# Altium PCB 转接板V02.PcbDoc
Units mil, origin at the board's own origin, x right, y up, seen from the top; angles counter-clockwise.
Board outline 1410.03 x 2710.03 mil, 2 copper layers (Top Layer, Bottom Layer); 10 components, 14 nets, 93 pads, 111 vias.
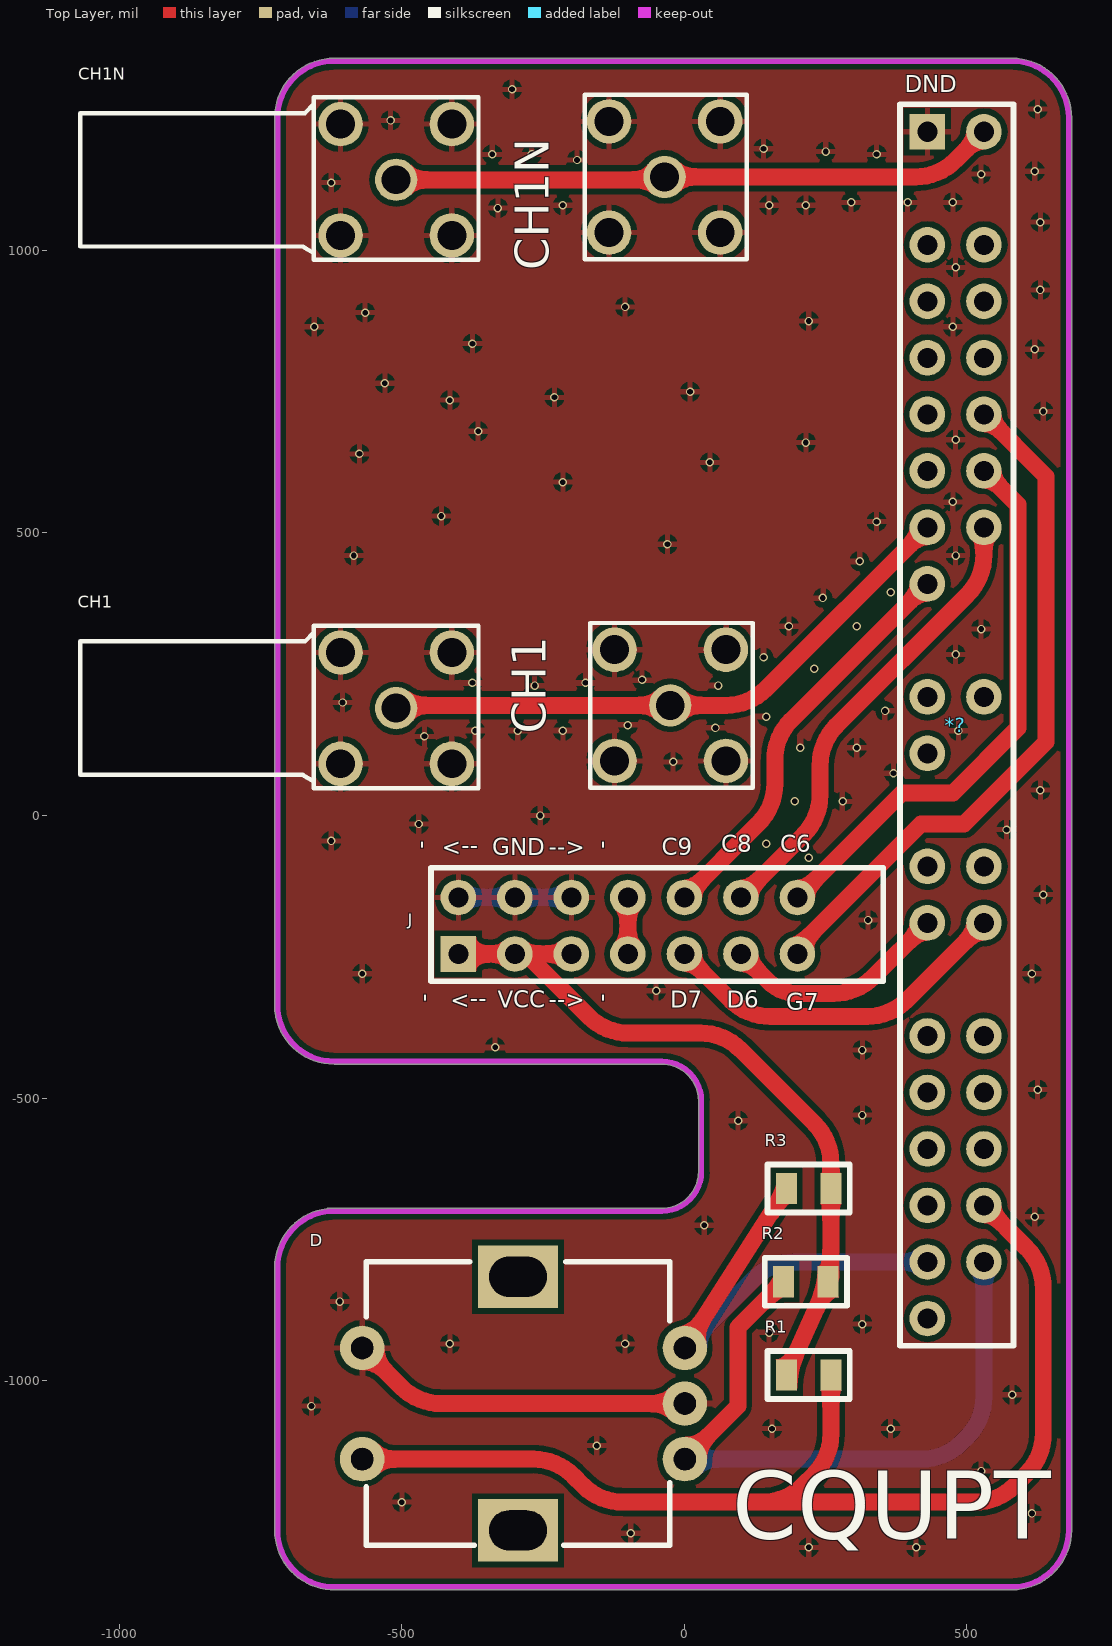
[diagram p0: Top Layer view]
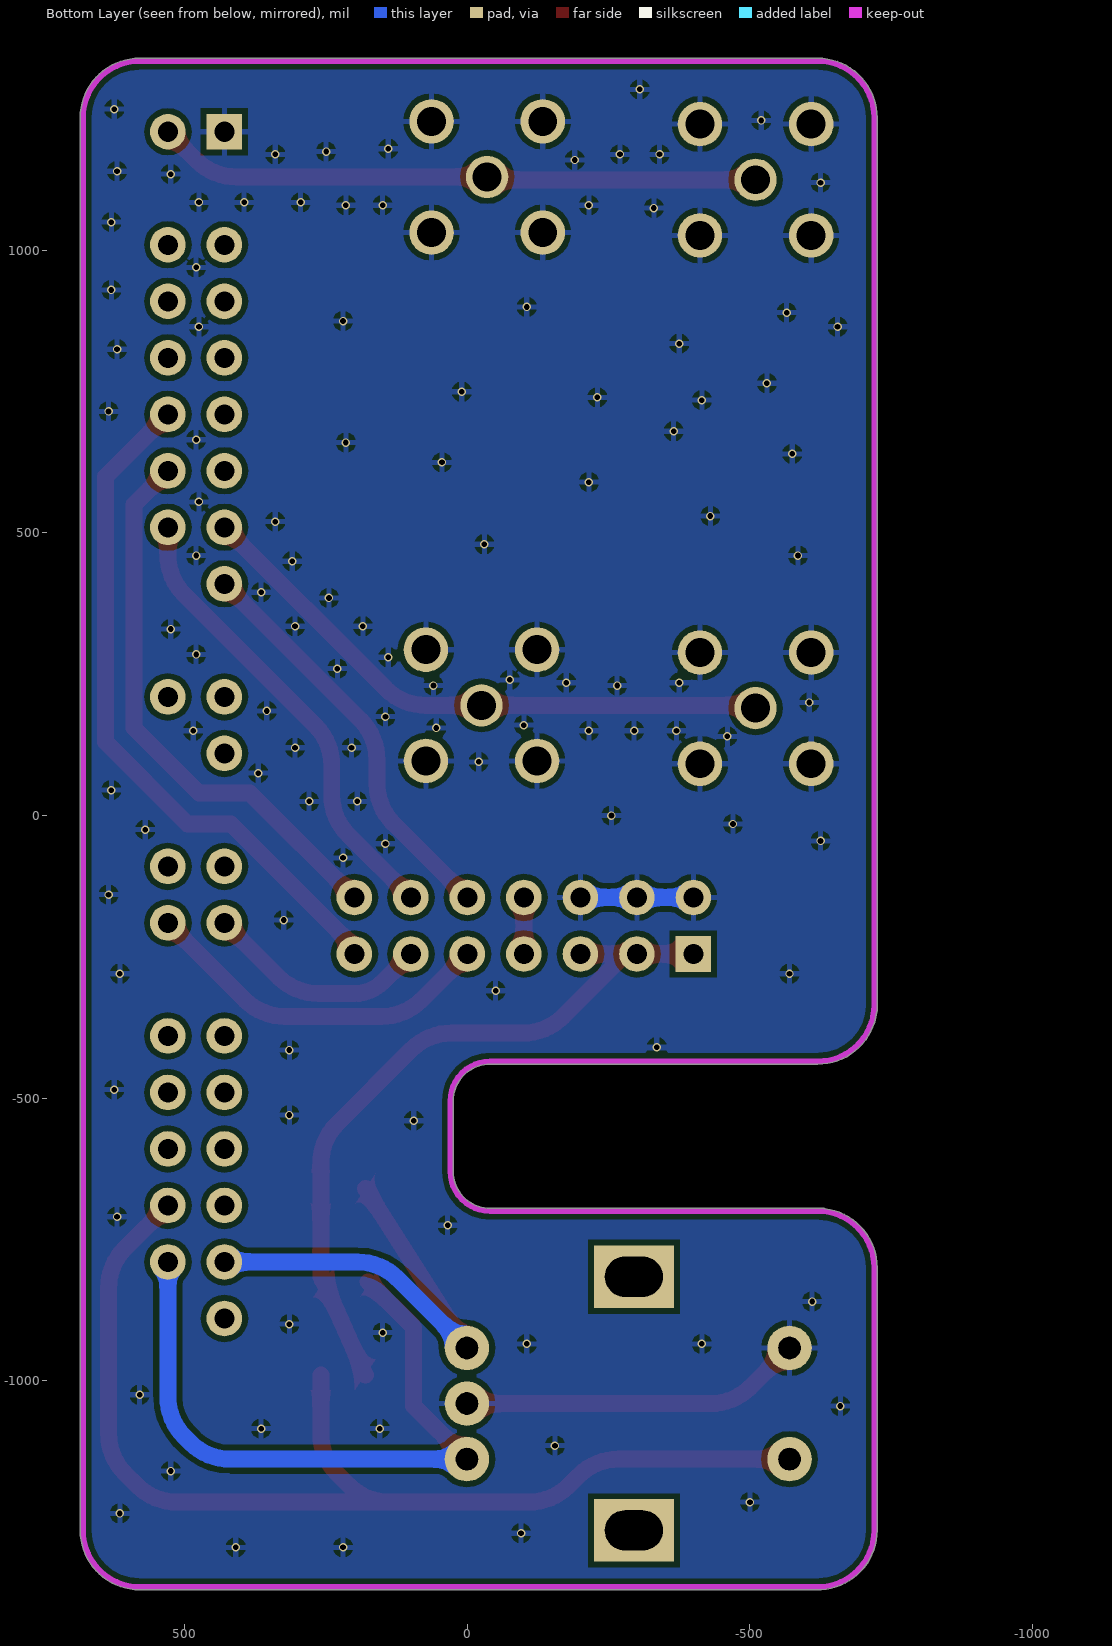
[diagram p1: Bottom Layer view, seen from below]
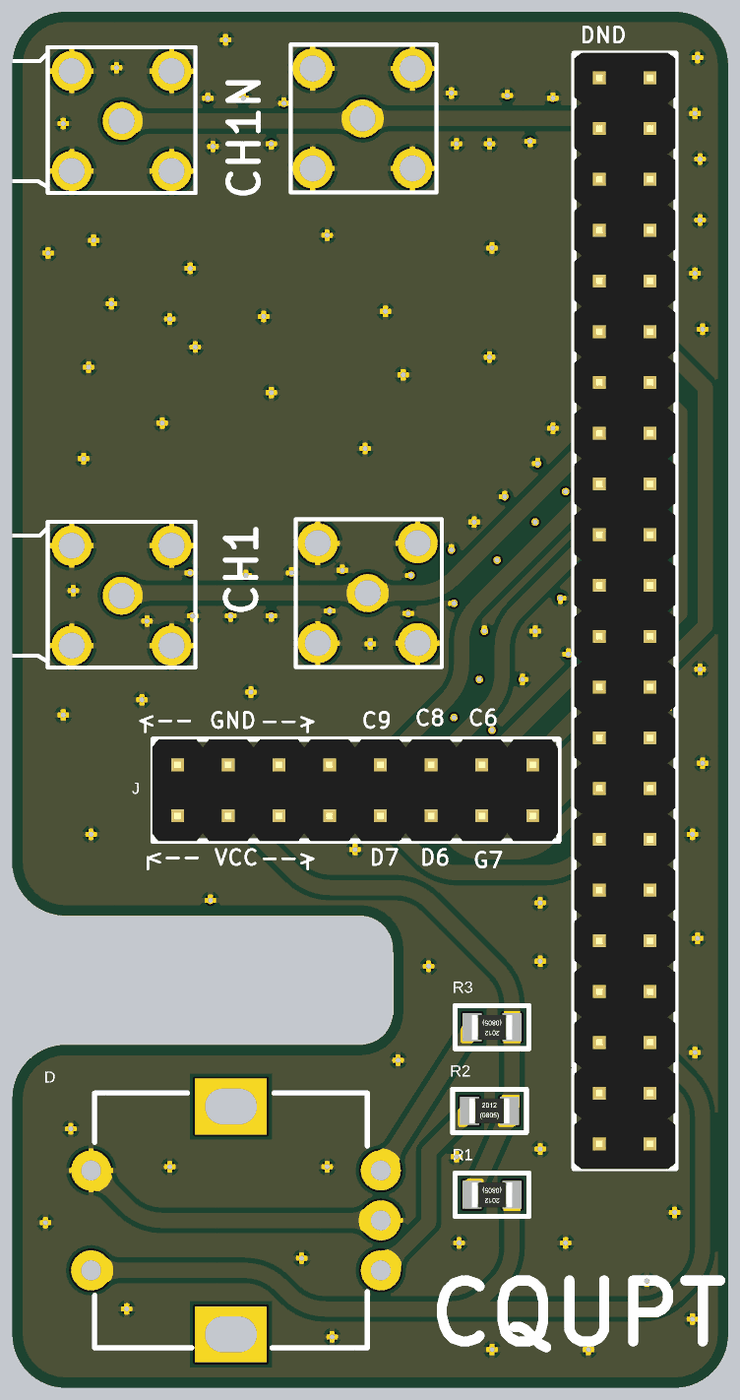
[diagram p2: 3D render of the assembled board from above, using the file's embedded part models]

## Layer stack, top to bottom
Top Solder: solder mask 0.4, Solder Resist, Dk 3.5
Top Layer: signal copper 1.4
Dielectric 1: dielectric 12.6, FR-4, Dk 4.8
Bottom Layer: signal copper 1.4
Bottom Solder: solder mask 0.4, Solder Resist, Dk 3.5

## Board outline
-725.01,-1265 -725.01,-800 cw(c-620,-800) -632.66,-695.75 cw(c-630,-700) -630,-694.98 -40,-694.98 ccw(c-40,-630) 24.99,-630 24.99,-505 ccw(c-40,-505) -40,-440.02 -620,-440.02 cw(c-620,-335) -724.25,-347.66 cw(c-720,-345) -725.01,-345 -725.01,1235 cw(c-620,1235) -620,1340.01 580,1340.01 cw(c580,1235) 685.01,1235 685.01,-1265 cw(c580,-1265) 580,-1370.02 -625,-1370.02 cw(c-625,-1365) -626.38,-1369.82 cw(c-620,-1265)

## Design rules (kind name [scope] priority, off if disabled: settings)
Clearance [All] p1: gap=10
PolygonConnect [All] p1: connectstyle=Relief reliefconductorwidth=10 reliefentries=4 polygonreliefangle="90 Angle" airgapwidth=10
RoutingVias [All] p1: holewidth=28 width=50 viastyle="Through Hole" minholewidth=28 minwidth=50 maxholewidth=28 maxwidth=50
SolderMaskExpansion [All] p1: expansion=4
Width [All] p1: maxlimit=200 minlimit=20 preferedwidth=30
30 further rules are at their usual default settings.

## Components (designator, comment, footprint, x,y, rotation, side; value= is the part's Value field where it differs from the comment)
*? "Left_out" Header2.54_2X22 470,260 r270 top
CH1 "SMA" SMA -411.57,91.57 r180 top
CH1 "SMA" SMA -123.43,96.57 r90 top (schematic designator CH1_1)
CH1N "SMA" SMA -411.57,1026.57 r180 top
CH1N "SMA" SMA -133.43,1031.57 r90 top (schematic designator CH1N_1)
D "Coder" Coder -315,-1035 r90 top
J "Header2.54_2X8" "Header 2.54_2X8" -50,-195 r0 top
R1 "RES_0805" 0805_R 220,-990 r180 top
R2 "RES_0805" 0805_R 215,-825 r0 top
R3 "RES_0805" 0805_R 220,-660 r180 top

## Footprints (in the part's own frame and the unit in brackets; to place one, negate y for a bottom-side part, rotate by r counter-clockwise, add the part's x,y. Pads: shape width x height; smd on the part's side, far side on the other; paste and mask are expansions set on the pad)
0805_R [mm]
  rect 0.95x1.4 smd: 1(-1,0) 2(1,0)
  silkscreen extent -1.85,-1.08 1.85,1.08, body extent -1,-0.62 1,0.63, height 0.45
Coder [mm]
  rect 2.8x3.6 hole 1.8 slot 2.6 at 90 deg: 0(-5.842,-0.521) 0(5.558,-0.521)
  round 2 hole 1 slot 1.005 at 0 deg: 1(-2.642,6.48) 2(2.357,6.48) 3(2.357,-8.021) 4(-0.142,-8.021) 5(-2.642,-8.021)
  silkscreen extent -6.52,-7.35 6.23,6.3
Header2.54_2X22 [mm]
  rect 1.6x1.6 hole 0.9: 1(-24.13,-1.016)
  round 0 all layers, no hole: 2(-21.59,-1.016) 10(-1.27,-1.016) 13(6.35,-1.016) 16(13.97,-1.016) 23(29.21,1.524) 29(13.97,1.524) 32(6.35,1.524) 33(3.81,1.524) 35(-1.27,1.524) 36(-3.81,1.524) 43(-21.59,1.524)
  round 1.6 hole 0.9: 3(-19.05,-1.016) 4(-16.51,-1.016) 5(-13.97,-1.016) 6(-11.43,-1.016) 7(-8.89,-1.016) 8(-6.35,-1.016) 9(-3.81,-1.016) 11(1.27,-1.016) 12(3.81,-1.016) 14(8.89,-1.016) 15(11.43,-1.016) 17(16.51,-1.016) 18(19.05,-1.016) 19(21.59,-1.016) 20(24.13,-1.016) 21(26.67,-1.016) 22(29.21,-1.016) 24(26.67,1.524) 25(24.13,1.524) 26(21.59,1.524) 27(19.05,1.524) 28(16.51,1.524) 30(11.43,1.524) 31(8.89,1.524) 34(1.27,1.524) 37(-6.35,1.524) 38(-8.89,1.524) 39(-11.43,1.524) 40(-13.97,1.524) 41(-16.51,1.524) 42(-19.05,1.524) 44(-24.13,1.524)
  silkscreen extent -25.36,-2.25 30.44,2.85, body extent -25.4,-2.25 30.48,2.83, height 8.6
"Header 2.54_2X8" [mm]
  rect 1.6x1.6 hole 0.9: 1(-8.89,-1.27)
  round 1.6 hole 0.9: 2(-6.35,-1.27) 3(-3.81,-1.27) 4(-1.27,-1.27) 5(1.27,-1.27) 6(3.81,-1.27) 7(6.35,-1.27) 10(6.35,1.27) 11(3.81,1.27) 12(1.27,1.27) 13(-1.27,1.27) 14(-3.81,1.27) 15(-6.35,1.27) 16(-8.89,1.27)
  round 0 all layers, no hole: 8(8.89,-1.27) 9(8.89,1.27)
  silkscreen extent -10.12,-2.5 10.21,2.6, body extent -10.16,-2.5 10.16,2.58, height 8.6
SMA [mm]
  round 2 hole 1.3: 0(0,0) 0(0,-5) 0(5,0) 0(5,-5)
  round 1.9 hole 1.3: 1(2.5,-2.5)
  silkscreen extent -1.2,-6.2 16.7,1.1

## Part data
R1 R2 R3: "贴片电阻，0805封装"

## Via types
v1: diameter 15, hole 10, Top Layer to Bottom Layer, 111 vias

## Nets (pads, with @x,y where several pads share a name; then routed paths per layer and width w, separated by ;. In a path a pad name is that pad's centre, name@x,y a point inside that pad or via, vN(x,y) a via of type N, cw(c..) or ccw(c..) an arc to the next point about the centre after c; other vN are vias at no path point)
A: *?.21 D.3 R3.2 | length 822.6
  Top Layer w30: D.3 R3.2
  Bottom Layer w30: D.3 123.71,-819.29 cw(c194.42,-890) 194.42,-790 *?.21
B: *?.24 D.5 R2.1 | length 1215.6
  Top Layer w30: D.5 95,-1044.8 95,-905.63 R2.1
  Bottom Layer w30: D.5 419.58,-1139 ccw(c419.58,-1039) 490.29,-1109.71 500.71,-1099.29 ccw(c430,-1028.58) 530,-1028.58 *?.24
GND: *?.1 CH1.0 CH1N.0 D.2 D.4 J.14 J.15 J.16 | length 807.4
  Top Layer w30: D.2 -500.99,-1011.31 ccw(c-430.28,-940.6) -430.28,-1040.6 D.4
  Bottom Layer w30: J.16 J.15 J.14
  other v1: 220,-1295 410,-1295 -95,-1270 615,-1235 -500,-1215 525,-1160 -155,-1115 155,-1085 365,-1085 -660,-1045 580,-1025 -415,-935 -105,-935 150,-915 315,-900 -610,-860 35,-725 620,-710 95,-540 315,-530 625,-485 315,-415 -335,-410 -50,-310 -570,-280 615,-280 325,-185 635,-140 220,-75 145,-50 -625,-45 570,-25 -470,-15 -255,0 195,25 280,25 630,45 370,75 -20,95 205,120 305,120 -460,140 -370,150 -295,150 -215,150 485,150 55,155 -100,160 145,175 355,185 -605,200 -265,230 60,230 -375,235 -175,235 -75,240 230,260 140,280 480,285 525,330 185,335 305,335 245,385 365,395 310,450 -585,460 480,460 -30,480 340,520 -430,530 475,555 -215,590 45,625 -575,640 215,660 480,665 -365,680 635,715 -415,735 -230,740 10,750 -530,765 620,825 -375,835 -655,865 475,865 220,875 -565,890 -105,900 630,930 480,970 630,1050 -330,1075 -215,1080 150,1080 215,1080 295,1085 395,1085 475,1085 -625,1120 525,1135 620,1140 -190,1160 -340,1170 -270,1170 340,1170 250,1175 140,1180 -520,1230 625,1250 -305,1285
KEY: *?.25 D.1 R1.1 | length 2027.4
  Top Layer w30: D.1 -267.42,-1139 cw(c-267.42,-1239) -196.71,-1168.29 -179.29,-1185.71 ccw(c-108.58,-1115) -108.58,-1215 138.58,-1215 ; R1.1 259.37,-1094.21 cw(c159.37,-1094.21) 230.08,-1164.92 209.29,-1185.71 cw(c138.58,-1115) 138.58,-1215 ; *?.25 605.71,-765.71 cw(c535,-836.42) 635,-836.42 635,-1093.58 cw(c535,-1093.58) 605.71,-1164.29 584.29,-1185.71 cw(c513.58,-1115) 513.58,-1215 138.58,-1215
NetJ_4: J.4 J.13 | length 100
  Top Layer w30: J.4 J.13
PC6: *?.38 J.10 | length 1002.7
  Top Layer w30: J.10 385,40 475,40 590,155 590,550 *?.38 *?.38@538.58,610
PC8: *?.37 J.11 | length 820.2
  Top Layer w30: J.11 210.71,-34.29 ccw(c140,36.42) 240,36.42 240,88.58 cw(c340,88.58) 269.29,159.29 500.71,390.71 ccw(c430,461.42) 530,461.42 *?.37
PC9: *?.9 J.12 | length 724.5
  Top Layer w30: J.12 130.71,-14.29 ccw(c60,56.42) 160,56.42 160,98.58 cw(c260,98.58) 189.29,169.29 *?.9
PD6: *?.15 J.6 | length 403.4
  Top Layer w30: J.6 148.79,-293.79 ccw(c200,-242.57) 200,-315 263.58,-315 ccw(c263.58,-215) 334.29,-285.71 *?.15
PD7: *?.30 J.5 | length 635.9
  Top Layer w30: J.5 81.39,-326.39 ccw(c152.1,-255.68) 152.1,-355.68 322.9,-355.68 ccw(c322.9,-255.68) 393.61,-326.39 *?.30
PG7: *?.39 J.7 | length 1227.6
  Top Layer w30: J.7 200,-233.5 418.5,-15 495,-15 640,130 640,600 *?.39
TIM8_CH2: *?.8 CH1.1 | length 1067.5
  Top Layer w30: CH1.1@-510,190 cw(c-497.93,177.93) -497.93,195 -25,195 73.58,195 ccw(c73.58,295) 144.29,224.29 *?.8
TIM8_CH2N: *?.44 CH1N.1 | length 1070.2
  Top Layer w30: CH1N.1@-510,1125 -47.07,1125 ccw(c-47.07,1142.07) -35,1130 408.58,1130 ccw(c408.58,1230) 479.29,1159.29 *?.44
VCC: J.1 J.2 J.3 R1.2 R2.2 R3.1 | length 1313.5
  Top Layer w30: J.1 J.2 ; J.3 J.2 ; R1.2 R2.2 ccw(c242.3,-812.93) 259.37,-812.93 R3.1 259.37,-615.79 ccw(c159.37,-615.79) 230.08,-545.08 99.29,-414.29 ccw(c28.58,-485) 28.58,-385 -98.58,-385 cw(c-98.58,-285) -169.29,-355.71 -265.86,-259.14 ccw(c-300,-293.28) J.2
pads on no net: *?.2 *?.3 *?.4 *?.5 *?.6 *?.7 *?.10 *?.11 *?.12 *?.13 *?.14 *?.16 *?.17 *?.18 *?.19 *?.20 *?.22 *?.23 *?.26 *?.27 *?.28 *?.29 *?.31 *?.32 *?.33 *?.34 *?.35 *?.36 *?.40 *?.41 *?.42 *?.43 D.0 J.8 J.9

## Polygon pours and split planes (outlines as drawn)
GND on Top Layer "Top Layer-No Net" (solid, remove dead copper, pour order 0): -760,1460 -760,-1369.64 ccw(c-674.64,-1369.64) -735,-1430 -719.29,-1445.71 ccw(c-648.58,-1375) -648.58,-1475 715,-1475 715,1298.58 cw(c815,1298.58) 744.29,1369.29 755,1380 704.29,1430.71 ccw(c633.58,1360) 633.58,1460 -735,1460
GND on Bottom Layer "Top Layer-No Net" (solid, remove dead copper, pour order 2): -755,-1385 675.86,-1385 ccw(c675.86,-1350.86) 700,-1375 700,1355 -720.86,1355 ccw(c-720.86,1320.86) -745,1345 -745,-1375

## Keep-outs
Keep-Out Layer:
  lines w10: -720,-345 -720,1235 cw(c-620,1235) -620,1335 15,1335 580,1335 cw(c580,1235) 680,1235 680,-1265 cw(c580,-1265) 580,-1365 130,-1365 ; -720,-335 ccw(c-620,-335) -620,-435 -70,-435 -40,-435 cw(c-40,-505) 30,-505 30,-520 30,-630 cw(c-40,-630) -40,-700 -630,-700 ; -625,-1365 380,-1365 ; -620,-1365 cw(c-620,-1265) -720,-1265 -720,-800 cw(c-620,-800) -620,-700

## Silkscreen, mask and mechanical layers (free items; w line width, h text height)
Top Overlay:
  text "DND" at 390,1280 h30
  text "-" at -475,-45 h30 r270
  text "-->" at -365,-45 h30 r180
  text "-" at -155,-45 h30 r270
  text "C8" at 65,-65 h30
  text "C6" at 170,-65 h30
  text "GND" at -340,-70 h30
  text "-->" at -240,-70 h30
  text "C9" at -40,-70 h30
  text "-" at -470,-315 h30 r270
  text "-->" at -350,-315 h30 r180
  text "-" at -155,-315 h30 r270
  text "VCC" at -330,-340 h30
  text "-->" at -240,-340 h30
  text "D7" at -25,-340 h30
  text "D6" at 75,-340 h30
  text "G7" at 180,-345 h30
  text "CQUPT" at 85,-1280 h120